# Altium PCB BD682.PcbDoc
Units mil, origin at the board's own origin, x right, y up, seen from the top; angles counter-clockwise.
Board outline 3937.01 x 3937.01 mil, 2 copper layers (Top Layer, Bottom Layer); 132 components, 119 nets, 446 pads, 0 vias.
Unrouted connection lines stored in the file: 318.
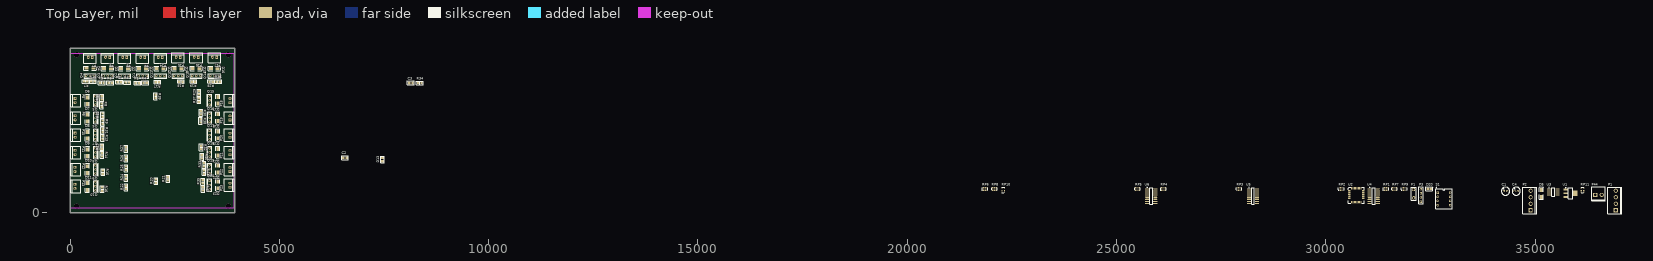
[diagram p0: Top Layer view]
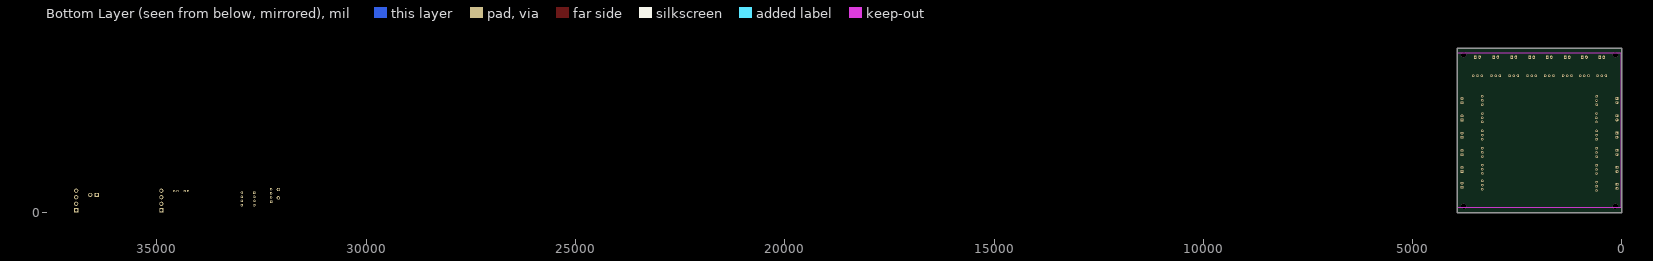
[diagram p1: Bottom Layer view, seen from below]

## Layer stack, top to bottom
Top Solder: solder mask 0.4, Solder Resist, Dk 3.5
Top Layer: signal copper 1.4
Dielectric 1: dielectric 12.6, FR-4, Dk 4.8
Bottom Layer: signal copper 1.4
Bottom Solder: solder mask 0.4, Solder Resist, Dk 3.5

## Board outline
0,0 0,3937.01 3937.01,3937.01 3937.01,0

## Design rules (kind name [scope] priority, off if disabled: settings)
Clearance [All] p1: gap=10
PolygonConnect [All] p1: connectstyle=Relief reliefconductorwidth=10 reliefentries=4 polygonreliefangle="90 Angle" airgapwidth=10
RoutingVias [All] p1: holewidth=28 width=50 viastyle="Through Hole" minholewidth=28 minwidth=50 maxholewidth=28 maxwidth=50
SolderMaskExpansion [All] p1: expansion=4
Width [All] p1: maxlimit=10 minlimit=10 preferedwidth=10
29 further rules are at their usual default settings.

## Components (designator, comment, footprint, x,y, rotation, side; value= is the part's Value field where it differs from the comment)
C1 "Cap Pol2" CAPPR2-5x11.5 34295,520 r0 top
C2 "0.1uF" CAPC2012M 6567.91,1319.88 r0 top
C3 "0.1uF" CAPC2012M 8142.99,3104.53 r0 top
C4 "Cap Pol2" CAPPR2-5x11.5 34550,520 r0 top
D1 "1N4007" DSO-C2/X1.8 1729.33,3448.82 r0 top
D2 "1N4007" DSO-C2/X1.8 1299.88,3448.82 r0 top
D3 "1N4007" DSO-C2/X1.8 892.4,3448.82 r0 top
D4 "1N4007" DSO-C2/X1.8 475.39,3455.71 r0 top
D5 "1N4007" DSO-C2/X1.8 35150,465 r90 top
D6 "1N4007" DSO-C2/X1.8 410.43,2679.8 r90 top
D7 "1N4007" DSO-C2/X1.8 410.43,2266.42 r90 top
D8 "1N4007" DSO-C2/X1.8 410.43,1854.2 r90 top
D9 "1N4007" DSO-C2/X1.8 410.43,1438.66 r90 top
D10 "1N4007" DSO-C2/X1.8 410.43,1033.33 r90 top
D11 "1N4007" DSO-C2/X1.8 410.43,631.57 r90 top
D12 "1N4007" DSO-C2/X1.8 2150.28,3448.82 r0 top
D13 "LED" LED2012M 7463.58,1276.57 r90 top
D14 "1N4007" DSO-C2/X1.8 2577.44,3448.82 r0 top
D15 "1N4007" DSO-C2/X1.8 3008.86,3448.82 r0 top
D16 "1N4007" DSO-C2/X1.8 3444.75,3448.82 r0 top
D17 "1N4007" DSO-C2/X1.8 3528.54,2691.61 r270 top
D18 "1N4007" DSO-C2/X1.8 3528.54,2278.23 r270 top
D19 "1N4007" DSO-C2/X1.8 3528.54,1863.86 r270 top
D20 "LED" LED2012M 32475,575 r0 top
D21 "1N4007" DSO-C2/X1.8 3528.54,1450.79 r270 top
D22 "1N4007" DSO-C2/X1.8 3528.54,1047.24 r270 top
D23 "1N4007" DSO-C2/X1.8 3528.54,669.29 r270 top
F1 "Fuse" SR075 32100,360 r90 top
P1 "Header 4" VH396-4 37075,-25 r90 top
P2 "Header 4" VH396-4 35040,-25 r90 top
P3 "Header 4" HDR1X4 32275,270 r90 top
P4 "Header 2" XH254-2 1783.78,3719.49 r180 top
P5 "Header 2" XH254-2 1354.33,3719.49 r180 top
P6 "Header 2" XH254-2 946.85,3719.49 r180 top
P7 "Header 2" XH254-2 530,3720 r180 top
P8 "Header 2" XH254-2 119.09,2734.25 r270 top
P9 "Header 2" XH254-2 119.09,2320.87 r270 top
P10 "Header 2" XH254-2 119.09,1908.65 r270 top
P11 "Header 2" XH254-2 119.09,1493.11 r270 top
P12 "Header 2" XH254-2 116.14,1087.78 r270 top
P13 "Header 2" XH254-2 116.14,686.02 r270 top
P14 "Header 2" XH254-2 2204.72,3718.5 r180 top
P15 "Header 2" XH254-2 2631.89,3721.46 r180 top
P16 "Header 2" XH254-2 3063.31,3721.46 r180 top
P17 "Header 2" XH254-2 3499.2,3721.46 r180 top
P18 "Header 2" XH254-2 3819.88,2634.25 r90 top
P19 "Header 2" XH254-2 3819.88,2220.87 r90 top
P20 "Header 2" XH254-2 3819.88,1806.5 r90 top
P21 "Header 2" XH254-2 3819.88,1393.43 r90 top
P22 "Header 2" XH254-2 3819.88,989.88 r90 top
P23 "Header 2" XH254-2 3819.88,611.93 r90 top
P44 "Header 2" VH396-2 36350,285 r0 top
Q1 "PNP" SOT_32 1834.78,3277.56 r180 top
Q2 "PNP" SOT_32 1405.33,3277.56 r180 top
Q3 "PNP" SOT_32 997.85,3277.56 r180 top
Q4 "PNP" SOT_32 581,3277.56 r180 top
Q5 "PNP" SOT_32 604.33,2785.25 r270 top
Q6 "PNP" SOT_32 607.28,2371.87 r270 top
Q7 "PNP" SOT_32 604.33,1959.65 r270 top
Q8 "PNP" SOT_32 604.33,1544.11 r270 top
Q9 "PNP" SOT_32 604.33,1138.78 r270 top
Q10 "PNP" SOT_32 604.33,737.02 r270 top
Q11 "PNP" SOT_32 2255.72,3277.56 r180 top
Q12 "PNP" SOT_32 2682.89,3277.56 r180 top
Q13 "PNP" SOT_32 3114.31,3277.56 r180 top
Q14 "PNP" SOT_32 3550.2,3277.56 r180 top
Q15 "PNP" SOT_32 3334.65,2587.25 r90 top
Q16 "PNP" SOT_32 3334.65,2173.87 r90 top
Q17 "PNP" SOT_32 3334.65,1759.5 r90 top
Q18 "PNP" SOT_32 3334.65,1346.43 r90 top
Q19 "PNP" SOT_32 3334.65,942.88 r90 top
Q20 "PNP" SOT_32 3334.65,564.93 r90 top
R1 "100K" RESC2012M 1609.25,3101.38 r0 top
R2 "100K" RESC2012M 1176.18,3126.97 r0 top
R3 "100K" RESC2012M 759.84,3109.25 r0 top
R4 "1K" RESC2012M 1791.34,3109.25 r0 top
R5 "1K" RESC2012M 1367.13,3118.11 r0 top
R6 "1K" RESC2012M 959.65,3109.25 r0 top
R7 "100K" RESC2012M 372.05,3141.73 r180 top
R8 "100K" RESC2012M 752.95,2575.79 r270 top
R9 "100K" RESC2012M 777.56,2166.34 r270 top
R10 "1K" RESC2012M 547.24,3140.75 r0 top
R11 "1K" RESC2012M 754.92,2750 r90 top
R12 "1K" RESC2012M 777.56,2338.58 r90 top
R13 "100K" RESC2012M 775.59,1796.26 r270 top
R14 "100K" RESC2012M 761.81,1385.83 r270 top
R15 "100K" RESC2012M 784.45,976.38 r270 top
R16 "100K" RESC2012M 767.72,570.87 r270 top
R17 "100K" RESC2012M 2088.58,3125 r180 top
R18 "100K" RESC2012M 2649.61,3136.81 r180 top
R19 "100K" RESC2012M 2948.82,3137.8 r180 top
R20 "1K" RESC2012M 2052.17,761.81 r90 top
R21 "1K" RESC2012M 2335.63,812.01 r90 top
R22 "1K" RESC2012M 1339.37,610.87 r90 top
R23 "1K" RESC2012M 759.84,1574.8 r90 top
R24 "1K" RESC2012M 1339.37,840.87 r90 top
R25 "1K" RESC2012M 1339.37,1070.87 r90 top
R26 "1K" RESC2012M 1339.37,1300.87 r90 top
R27 "1K" RESC2012M 1339.37,1530.87 r90 top
R28 "100K" RESC2012M 3371.06,3136.81 r180 top
R29 "100K" RESC2012M 3078.74,2871.06 r90 top
R30 "100K" RESC2012M 3123.03,2391.73 r270 top
R31 "100K" RESC2012M 775.59,1972.44 r270 top
R32 "100K" RESC2012M 3131.89,1567.91 r270 top
R33 "100K" RESC2012M 3202.76,1151.57 r90 top
R34 "1K" RESC2012M 8357.99,3104.53 r0 top
R35 "100K" RESC2012M 3170.28,748.03 r90 top
R36 "1K" RESC2012M 3542.32,3136.81 r0 top
R37 "1K" RESC2012M 3078.74,2696.85 r90 top
R38 "1K" RESC2012M 3118.11,2198.82 r270 top
R39 "1K" RESC2012M 2044.29,2783.46 r270 top
R40 "1K" RESC2012M 3150.59,1339.57 r270 top
R41 "1K" RESC2012M 3200.79,976.38 r270 top
R42 "1K" RESC2012M 3171.26,574.8 r270 top
RP1 "470" EXB38V 31435,570 r0 top
RP2 "470" EXB38V 30370,570 r0 top
RP3 "470" EXB38V 27930,570 r0 top
RP4 "470" EXB38V 26120,570 r0 top
RP5 "470" EXB38V 25505,570 r0 top
RP6 "10K" EXB38V 21855,570 r0 top
RP7 "10K" EXB38V 31645,570 r0 top
RP8 "10K" EXB38V 22085,570 r0 top
RP9 "10K" EXB38V 31875,570 r0 top
RP10 "10K" EXB38V 22295,550 r90 top
RP11 "10K" EXB38V 36135,550 r90 top
S1 "SW DIP-4" SWITCH-8 32820,335 r0 top
U1 "LM7805" SOT223-4M 35845,470 r0 top
U2 "STC15W408S_LQFP32" LQFP32 30715,435 r0 top
U3 "MAX485ESA" SO8_M 35435,500 r0 top
U4 "ULN2003" SO16_M 31145,400 r0 top
U5 "ULN2003" SO16_M 28260,400 r0 top
U6 "ULN2003" SO16_M 25830,400 r0 top

## Footprints (in the part's own frame and the unit in brackets; to place one, negate y for a bottom-side part, rotate by r counter-clockwise, add the part's x,y. Pads: shape width x height; smd on the part's side, far side on the other; paste and mask are expansions set on the pad)
CAPC2012M [mm] "Chip Capacitor, Body 2.0x1.3mm, IPC Low Density"
  rect 1.5x1.6 smd: 1(-0.95,0) 2(0.95,0)
  silkscreen extent -2.1,-1.2 2.1,1.2, body extent -1.1,-0.72 1.1,0.72, height 1.1
CAPPR2-5x11.5 [mm] "Capacitor, Electrolytic, Radial; Body 5 x 11.5 mm (Dia.xH typ); Pin Spacing 2 mm (typ)"
  rect 1.35x1.35 hole 0.8: 1(-1,0)
  round 1.35 hole 0.8: 2(1,0)
  silkscreen extent -2.5,-2.5 2.5,2.5
DSO-C2/X1.8 [mm] "DO-214-AC/SMA; 2 C-Bend Leads; Body 5 x 2.7 mm, inc. leads (LxW)"
  rect 2.4x1.8 smd: 1(-2.05,0) 2(2.05,0)
  silkscreen extent -3.65,-1.3 3.95,1.3
EXB38V [mm] "Chip Resistor Array, (0603x4); SM; 8 Leads; Body 3.40 x 1.75 mm (LxW max)"
  rect 0.5x0.8 smd: 1(-1.2,-0.8) 2(-0.4,-0.8) 3(0.4,-0.8) 4(1.2,-0.8) 5(1.2,0.8) 6(0.4,0.8) 7(-0.4,0.8) 8(-1.2,0.8)
  silkscreen extent -1.75,-0.87 1.7,0.87
HDR1X4 [mm] "Connector; Header; 4 Position"
  rect 1.5x1.5 hole 0.9: 1(0,0)
  round 1.5 hole 0.9: 2(2.54,0) 3(5.08,0) 4(7.62,0)
  silkscreen extent -1.27,-1.27 8.89,1.27
LED2012M [mm] "Chip LED, Body 2.0x1.3mm, IPC Low Density"
  rect 1.5x1.6 smd: 1(-0.95,0) 2(0.95,0)
  silkscreen extent -2.1,-1.2 2.1,1.2, body extent -1.1,-0.72 1.1,0.72, height 1.1
LQFP32 [mm]
  oval 1.5x0.55 smd: 1(-3.81,2.54) 2(-3.81,1.74) 3(-3.81,0.94) 4(-3.81,0.14) 5(-3.81,-0.66) 6(-3.81,-1.46) 7(-3.81,-2.26) 8(-3.81,-3.06) 17(4.59,-3.06) 18(4.59,-2.26) 19(4.59,-1.46) 20(4.59,-0.66) 21(4.59,0.14) 22(4.59,0.94) 23(4.59,1.74) 24(4.59,2.54)
  oval 0.55x1.5 smd: 9(-2.41,-4.46) 10(-1.61,-4.46) 11(-0.81,-4.46) 12(-0.01,-4.46) 13(0.79,-4.46) 14(1.59,-4.46) 15(2.39,-4.46) 16(3.19,-4.46) 25(3.19,3.94) 26(2.39,3.94) 27(1.59,3.94) 28(0.79,3.94) 29(-0.01,3.94) 30(-0.81,3.94) 31(-1.61,3.94) 32(-2.41,3.94)
  silkscreen extent -4.51,-5.16 5.29,4.64
RESC2012M [mm] "Chip Resistor, Body 2.0x1.3mm, IPC Low Density"
  rect 1.4x1.5 smd: 1(-1,0) 2(1,0)
  silkscreen extent -2.1,-1.1 2.1,1.1, body extent -1.07,-0.7 1.07,0.7, height 0.65
SO8_M [mm] "SOIC, 8-Leads, Body 4.9x3.9mm, Pitch 1.27mm, IPC Low Density"
  oval 2.3x0.7 smd: 1(-2.55,1.905) 2(-2.55,0.635) 3(-2.55,-0.635) 4(-2.55,-1.905) 5(2.55,-1.905) 6(2.55,-0.635) 7(2.55,0.635) 8(2.55,1.905)
  silkscreen extent -2.67,-2.5 1,2.93, body extent -2,-2.5 2,2.5, height 1.75
SO16_M [mm] "SOIC, 16-Leads, Body 9.9x3.9mm, Pitch 1.27mm, IPC Low Density"
  oval 2.5x0.7 smd: 1(-2.45,4.445) 2(-2.45,3.175) 3(-2.45,1.905) 4(-2.45,0.635) 5(-2.45,-0.635) 6(-2.45,-1.905) 7(-2.45,-3.175) 8(-2.45,-4.445) 9(2.45,-4.445) 10(2.45,-3.175) 11(2.45,-1.905) 12(2.45,-0.635) 13(2.45,0.635) 14(2.45,1.905) 15(2.45,3.175) 16(2.45,4.445)
  silkscreen extent -2.57,-5 0.8,5.47, body extent -2,-5 2,5, height 1.75
SOT223-4M [mm] "SOT223/SC73, 4-Leads, Body 6.5x3.5mm, Pitch 2.3mm, Lead Span 7mm, IPC Low Density"
  rect 2.7x1 smd: 1(-2.95,2.3) 2(-2.95,0) 3(-2.95,-2.3)
  rect 2.7x3.3 smd: 4(2.95,0)
  silkscreen extent -3.07,-3.35 1.3,3.47, body extent -1.85,-3.35 1.85,3.35, height 1.8
SOT_32 [mil]
  round 60 hole 35.43: 1(0,0) 2(200,0) 3(100,0)
  silkscreen extent -49,-44 247,63
SR075 [mm]
  round 2 hole 1.2: 1(0,0) 2(5,0)
  silkscreen extent -1.5,-1.6 6.5,1.6
SWITCH-8 [mm] "DIP; 8 Leads; Row Spacing 7.62 mm; Pitch 2.54 mm"
  rect 1.5x1.5 hole 0.9: 1(-3.81,3.81)
  round 1.5 hole 0.9: 2(-3.81,1.27) 3(-3.81,-1.27) 4(-3.81,-3.81) 5(3.81,-3.81) 6(3.81,-1.27) 7(3.81,1.27) 8(3.81,3.81)
  silkscreen extent -5,-6 5,7.12, body extent -5,-6 5,6, height 6.2
VH396-2 [mm]
  rect 2.5x2.5 hole 1.6: 1(2.22,3.7)
  round 2.5 hole 1.6: 2(6.18,3.7)
  silkscreen extent 0,0 8.4,8.5
VH396-4 [mm]
  rect 2.5x2.5 hole 1.6: 1(2.22,3.7)
  round 2.5 hole 1.6: 2(6.18,3.7) 3(10.14,3.7) 4(14.1,3.7)
  silkscreen extent 0,0 16.32,8.5
XH254-2 [mm]
  rect 1.6x2 hole 0.9: 1(0,0)
  oval 1.6x2 hole 0.9: 2(2.54,0)
  silkscreen extent -2.54,-2.54 5.08,3.56

## Part data
C1 C4: "Polarized Capacitor (22uf-47uf)"
C2 C3: library part Cap, "Capacitor"
D1 D2 D3 D4 D5 D6 D7 D8 D9 D10 D11 D12 D14 D15 D16 D17 D18 D19 D21 D22 D23: library part Diode, "Default Diode"
D13 D20: "Typical INFRARED GaAs LED"
P1 P2 P3: "Header, 4-Pin"
P4 P5 P6 P7 P8 P9 P10 P11 P12 P13 P14 P15 P16 P17 P18 P19 P20 P21 P22 P23 P44: "Header, 2-Pin"
Q1 Q2 Q3 Q4 Q5 Q6 Q7 Q8 Q9 Q10 Q11 Q12 Q13 Q14 Q15 Q16 Q17 Q18 Q19 Q20: "PNP Bipolar Transistor"
R1 R2 R3 R4 R5 R6 R7 R8 R9 R10 R11 R12 R13 R14 R15 R16 R17 R18 R19 R20 R21 R22 R23 R24 R25 R26 R27 R28 R29 R30 R31 R32 R33 R34 R35 R36 R37 R38 R39 R40 R41 R42: library part Res, "Resistor"
RP1 RP2 RP3 RP4 RP5 RP6 RP7 RP8 RP9 RP10 RP11: library part "Res Pack"
S1: "DIP Switch, 4 Position, SPST"
U3: "Low-Power, Slew-Rate-Limited RS-485/RS-422 Transceiver"
U4 U5 U6: "Seven Darlington Array"

## Free pads (board coordinates)
  round 125.98 hole 125.98: 0(157.48,157.48) 0(157.48,3779.53) 0(3779.53,157.48) 0(3779.53,3779.53)

## Nets (pads, with @x,y where several pads share a name; then routed paths per layer and width w, separated by ;. In a path a pad name is that pad's centre, name@x,y a point inside that pad or via, vN(x,y) a via of type N, cw(c..) or ccw(c..) an arc to the next point about the centre after c; other vN are vias at no path point)
24V: D5.1 F1.1 P1.1 P2.1
24V_OUT: F1.2 P44.2 Q1.2 Q2.2 Q3.2 Q4.2 Q5.2 Q6.2 Q7.2 Q8.2 Q9.2 Q10.2 Q11.2 Q12.2 Q13.2 Q14.2 Q15.2 Q16.2 Q17.2 Q18.2 Q19.2 Q20.2 R1.2 R2.2 R3.2 R7.2 R8.2 R9.2 R13.2 R14.2 R15.2 R16.2 R17.2 R18.2 R19.2 R28.2 R29.2 R30.2 R31.2 R32.2 R33.2 R35.2
A: P1.3 P2.3 U3.6
ADDR1: RP11.5 S1.1 U2.18
ADDR2: RP11.6 S1.2 U2.17
ADDR3: RP11.7 S1.3 U2.16
ADDR4: RP11.8 S1.4 U2.15
B: P1.4 P2.4 U3.7
GND: C1.2 C2.1 C3.2 C4.2 D1.1 D2.1 D3.1 D4.1 D6.1 D7.1 D8.1 D9.1 D10.1 D11.1 D12.1 D14.1 D15.1 D16.1 D17.1 D18.1 D19.1 D21.1 D22.1 D23.1 P1.2 P2.2 P3.1 P4.2 P5.2 P6.2 P7.2 P8.2 P9.2 P10.2 P11.2 P12.2 P13.2 P14.2 P15.2 P16.2 P17.2 P18.2 P19.2 P20.2 P21.2 P22.2 P23.2 P44.1 R23.1 RP6.1 RP6.2 RP6.3 RP6.4 RP7.1 RP7.2 RP7.3 RP7.4 RP8.1 RP8.2 RP8.3 RP8.4 RP9.1 RP9.2 RP9.3 RP9.4 RP10.1 RP10.2 RP10.3 RP10.4 S1.5 S1.6 S1.7 S1.8 U1.2 U1.4 U2.12 U3.5 U4.8 U5.8 U6.8
LC1: RP3.6 U2.1
LC2: RP3.5 U2.2
LC3: RP2.8 U2.3
LC4: RP2.7 U2.4
LC5: RP2.6 U2.5
LC6: RP2.5 U2.6
LC7: RP1.8 U2.7
LC8: RP1.7 U2.8
LC9: RP1.6 U2.9
LC10: RP1.5 U2.11
LC11: RP3.7 U2.32
LC12: RP3.8 U2.31
LC13: RP4.5 U2.30
LC14: RP4.6 U2.29
LC15: RP4.7 U2.28
LC16: RP4.8 U2.27
LC17: RP5.5 U2.26
LC18: RP5.6 U2.25
LC19: RP5.7 U2.24
LC20: RP5.8 U2.23
LC_DRV1: R4.2 U5.14
LC_DRV2: R5.2 U5.15
LC_DRV3: R6.2 U5.16
LC_DRV4: R10.2 U4.10
LC_DRV5: R11.2 U4.11
LC_DRV6: R12.2 U4.12
LC_DRV7: R20.2 U4.13
LC_DRV8: R21.2 U4.14
LC_DRV9: R22.2 U4.15
LC_DRV10: R24.2 U4.16
LC_DRV11: R25.2 U5.12
LC_DRV12: R26.2 U5.11
LC_DRV13: R27.2 U5.10
LC_DRV14: R36.2 U6.16
LC_DRV15: R37.2 U6.15
LC_DRV16: R38.2 U6.14
LC_DRV17: R39.2 U6.13
LC_DRV18: R40.2 U6.12
LC_DRV19: R41.2 U6.11
LC_DRV20: R42.2 U6.10
LED1: D20.2 U2.22
NetC1_1: C1.1 C2.2 D5.2 U1.1
NetD1_2: D1.2 P4.1 Q1.3
NetD2_2: D2.2 P5.1 Q2.3
NetD3_2: D3.2 P6.1 Q3.3
NetD4_2: D4.2 P7.1 Q4.3
NetD6_2: D6.2 P8.1 Q5.3
NetD7_2: D7.2 P9.1 Q6.3
NetD8_2: D8.2 P10.1 Q7.3
NetD9_2: D9.2 P11.1 Q8.3
NetD10_2: D10.2 P12.1 Q9.3
NetD11_2: D11.2 P13.1 Q10.3
NetD12_2: D12.2 P14.1 Q11.3
NetD13_2: D13.2 R23.2
NetD14_2: D14.2 P15.1 Q12.3
NetD15_2: D15.2 P16.1 Q13.3
NetD16_2: D16.2 P17.1 Q14.3
NetD17_2: D17.2 P18.1 Q15.3
NetD18_2: D18.2 P19.1 Q16.3
NetD19_2: D19.2 P20.1 Q17.3
NetD20_1: D20.1 R34.1
NetD21_2: D21.2 P21.1 Q18.3
NetD22_2: D22.2 P22.1 Q19.3
NetD23_2: D23.2 P23.1 Q20.3
NetQ1_1: Q1.1 R1.1 R4.1
NetQ2_1: Q2.1 R2.1 R5.1
NetQ3_1: Q3.1 R3.1 R6.1
NetQ4_1: Q4.1 R7.1 R10.1
NetQ5_1: Q5.1 R8.1 R11.1
NetQ6_1: Q6.1 R9.1 R12.1
NetQ7_1: Q7.1 R13.1 R20.1
NetQ8_1: Q8.1 R14.1 R21.1
NetQ9_1: Q9.1 R15.1 R22.1
NetQ10_1: Q10.1 R16.1 R24.1
NetQ11_1: Q11.1 R17.1 R25.1
NetQ12_1: Q12.1 R18.1 R26.1
NetQ13_1: Q13.1 R19.1 R27.1
NetQ14_1: Q14.1 R28.1 R36.1
NetQ15_1: Q15.1 R29.1 R37.1
NetQ16_1: Q16.1 R30.1 R38.1
NetQ17_1: Q17.1 R31.1 R39.1
NetQ18_1: Q18.1 R32.1 R40.1
NetQ19_1: Q19.1 R33.1 R41.1
NetQ20_1: Q20.1 R35.1 R42.1
NetRP1_1: RP1.1 RP9.8 U4.4
NetRP1_2: RP1.2 RP9.7 U4.3
NetRP1_3: RP1.3 RP9.6 U4.2
NetRP1_4: RP1.4 RP9.5 U4.1
NetRP2_1: RP2.1 RP7.8 U5.1
NetRP2_2: RP2.2 RP7.7 U4.7
NetRP2_3: RP2.3 RP7.6 U4.6
NetRP2_4: RP2.4 RP7.5 U4.5
NetRP3_1: RP3.1 RP10.8 U5.6
NetRP3_2: RP3.2 RP10.7 U5.5
NetRP3_3: RP3.3 RP10.6 U5.3
NetRP3_4: RP3.4 RP10.5 U5.2
NetRP4_1: RP4.1 RP8.8 U6.3
NetRP4_2: RP4.2 RP8.7 U6.2
NetRP4_3: RP4.3 RP8.6 U6.1
NetRP4_4: RP4.4 RP8.5 U5.7
NetRP5_1: RP5.1 RP6.8 U6.7
NetRP5_2: RP5.2 RP6.7 U6.6
NetRP5_3: RP5.3 RP6.6 U6.5
NetRP5_4: RP5.4 RP6.5 U6.4
RS485: U2.21 U3.2 U3.3
RXD: U2.19 U3.1
RXD2: P3.3 U2.13
TXD: U2.20 U3.4
TXD2: P3.2 U2.14
VCC: C3.1 C4.1 D13.1 P3.4 R34.2 RP11.1 RP11.2 RP11.3 RP11.4 U1.3 U2.10 U3.8
pads on no net: U4.9 U5.4 U5.9 U5.13 U6.9

## Keep-outs
Keep-Out Layer:
  lines w10: 17.72,118.11 17.72,3818.9 3919.29,3818.9 3919.29,118.11 17.72,118.11

## Silkscreen, mask and mechanical layers (free items; w line width, h text height)
Mechanical 1:
  the board outline again, w10